# Altium PCB ARM TB V2 PCB.PcbDoc
Units mil, origin at the board's own origin, x right, y up, seen from the top; angles counter-clockwise.
Board outline 1500 x 1500 mil, 2 copper layers (Top Layer, Bottom Layer); 21 components, 20 nets, 154 pads, 11 vias.
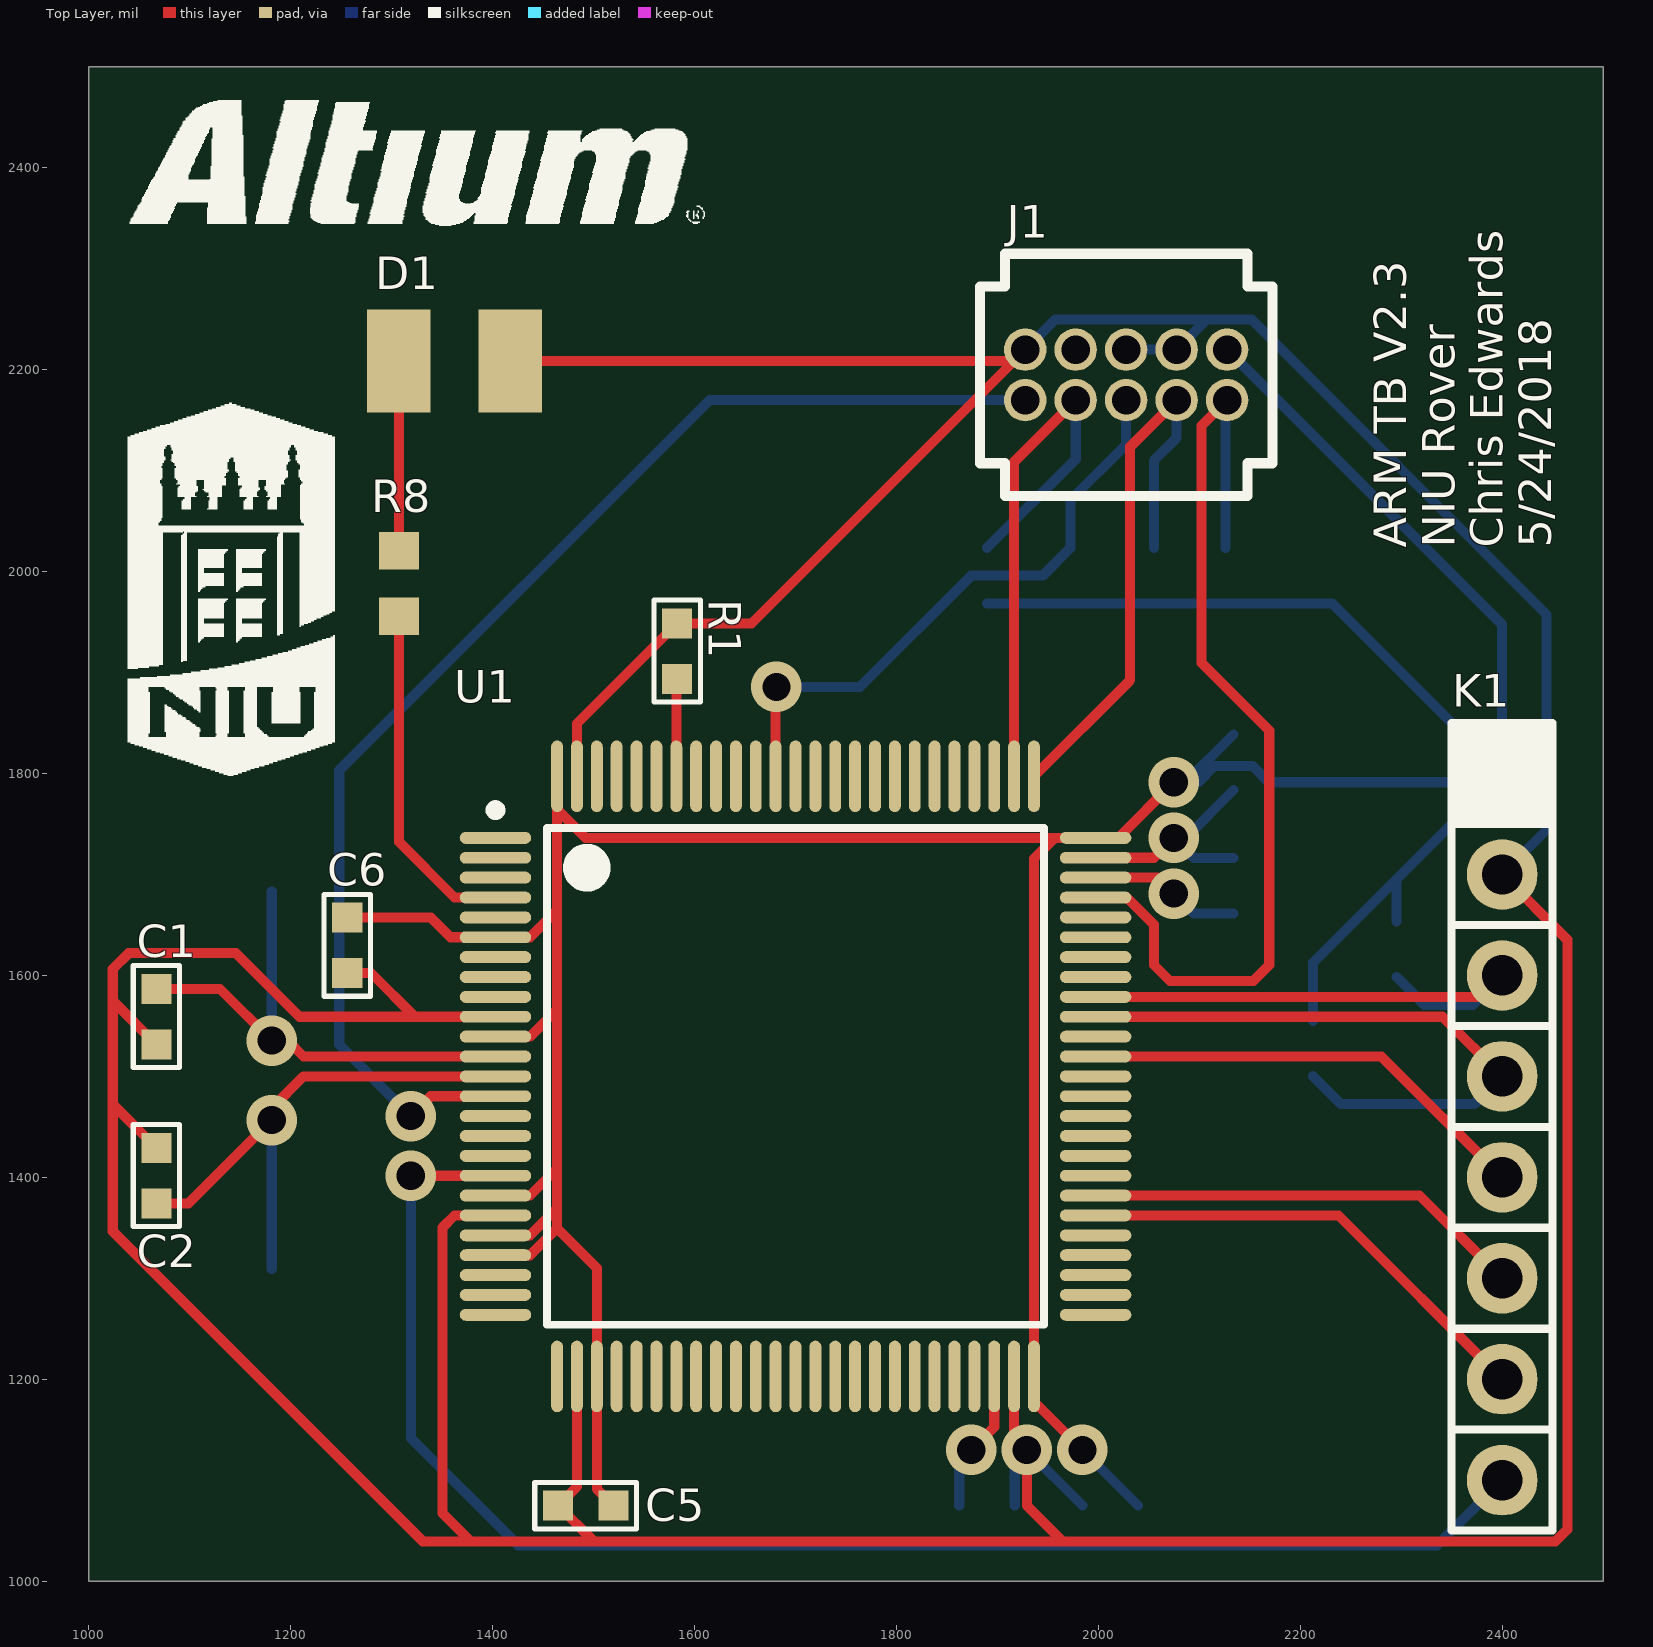
[diagram p0: Top Layer view]
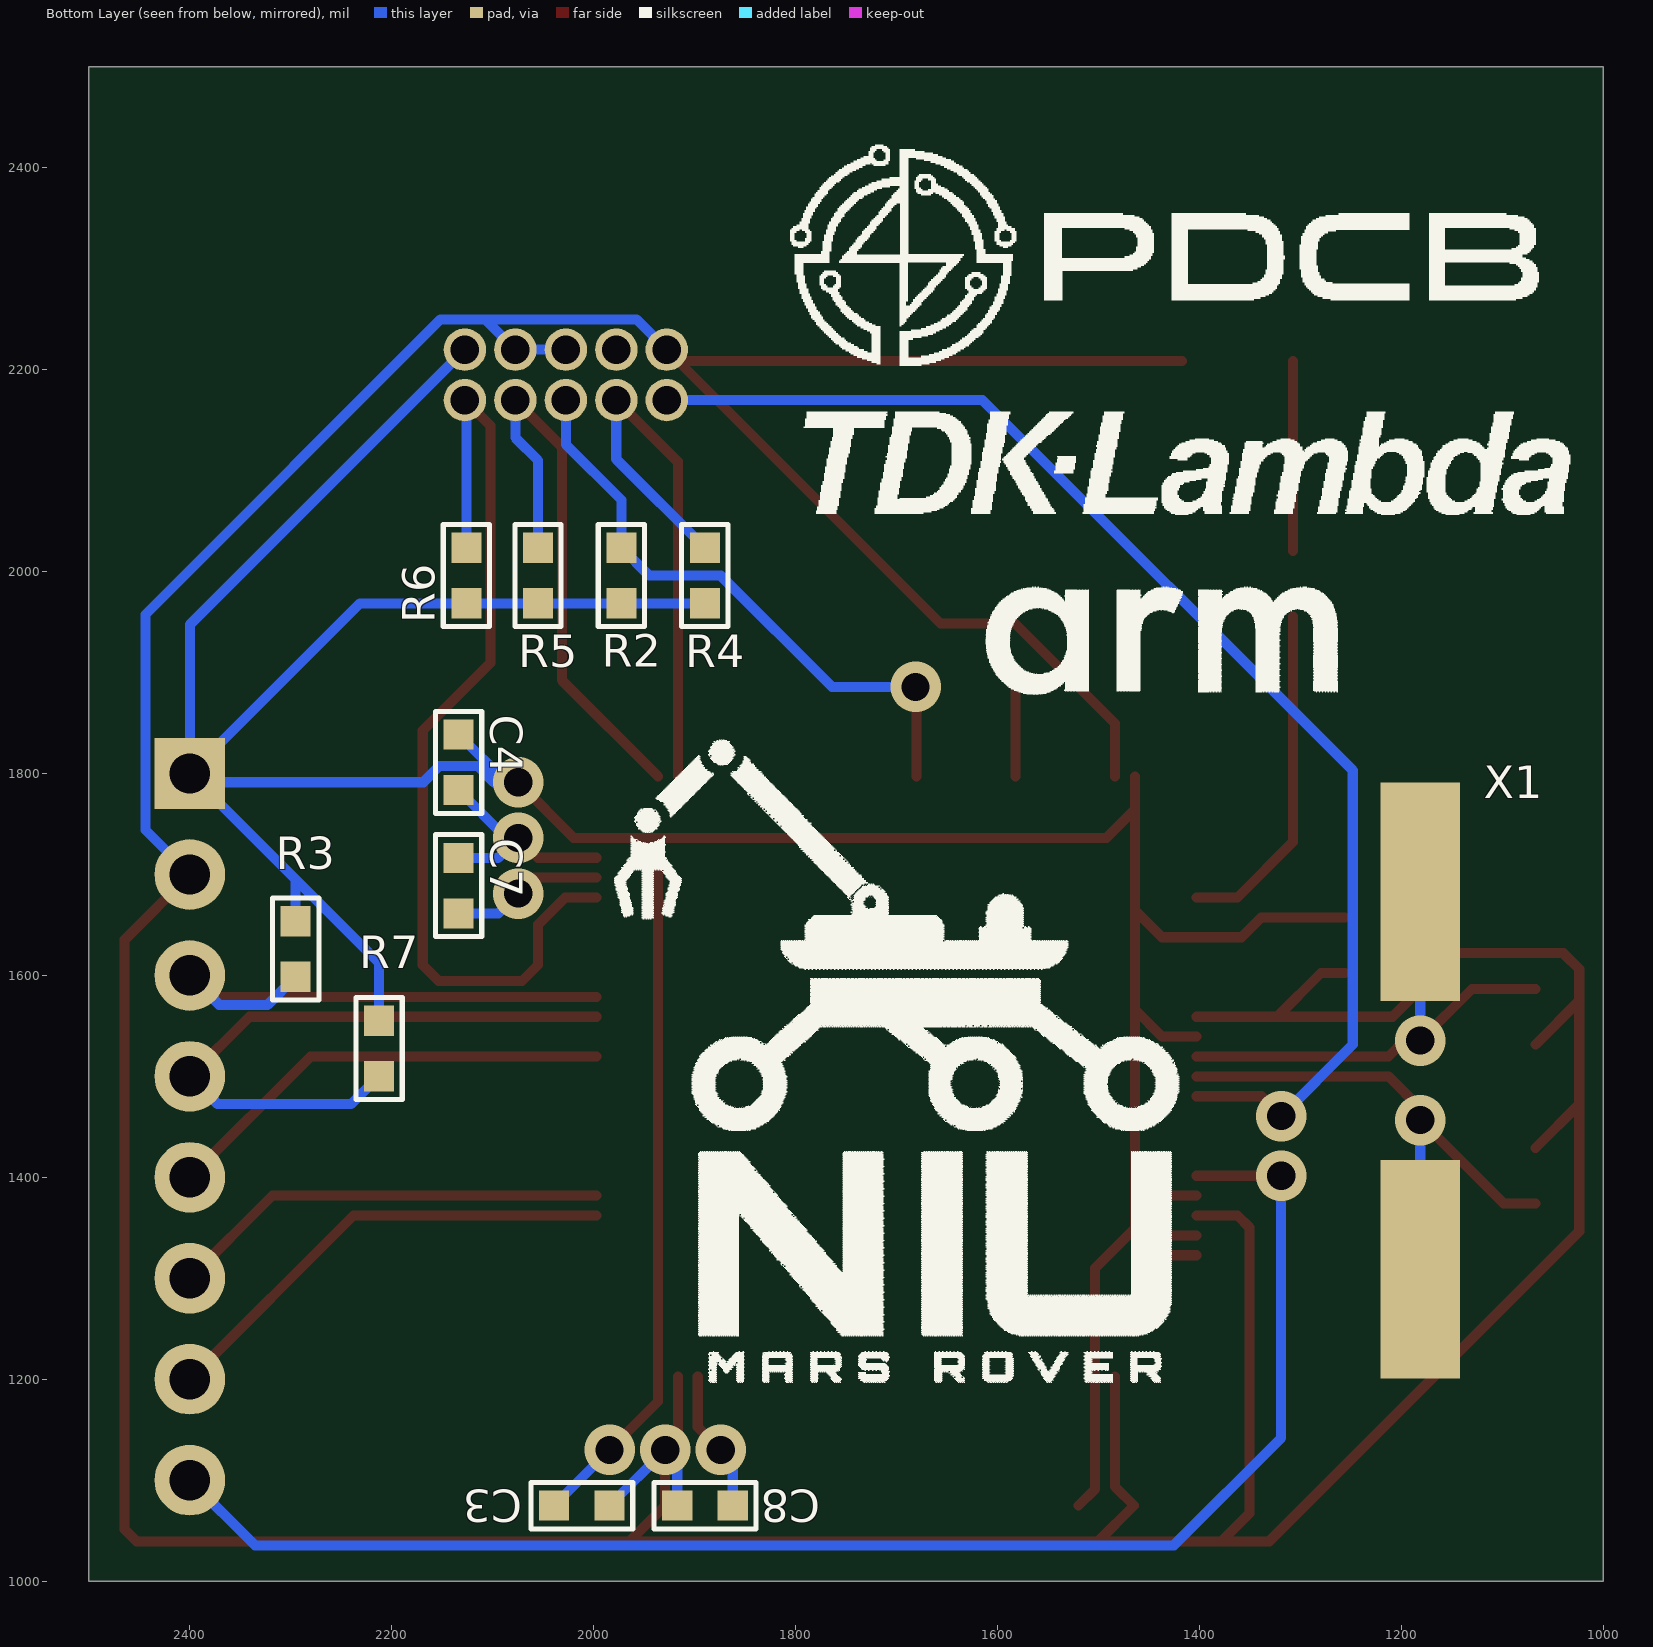
[diagram p1: Bottom Layer view, seen from below]

## Layer stack, top to bottom
Top Solder: solder mask 0.4, Solder Resist, Dk 3.5
Top Layer: signal copper 1.4
Dielectric 1: dielectric 12.6, FR-4, Dk 4.8
Bottom Layer: signal copper 1.4
Bottom Solder: solder mask 0.4, Solder Resist, Dk 3.5

## Board outline
1000,1000 2500,1000 2500,2500 1000,2500

## Design rules (kind name [scope] priority, off if disabled: settings)
AssemblyTestPointUsage [All] p1 off:
AssemblyTestpoint [All] p1 off: testpointundercomponent=TRUE minsize=40 maxsize=100 preferedsize=60 minholesize=0 maxholesize=40 preferedholesize=32 testpointgrid=1 usegrid=TRUE gridtolerance=0.01 allowsidetop=TRUE allowsidebottom=TRUE
Clearance [All] p1: gap=4 ignorepadtopadclearanceinfootprint=FALSE except(0: Arc-Hole Track-Hole SMDPad-Hole THPad-Hole Via-Hole Fill-Hole Poly-Hole Region-Hole Text-Hole)
ComponentClearance [All] p1 off: gap=1 collisioncheckmode=3 verticalgap=1 showdistances=FALSE
DiffPairsRouting DiffPairsRouting_DIFF100 [InDifferentialPairClass('DIFFPAIR_100')] p1: maxlimit=10 minlimit=4 mostfreqgap=6 toplayer_minwidth=4 toplayer_maxwidth=13 toplayer_prefwidth=5 bottomlayer_minwidth=4 bottomlayer_maxwidth=13 bottomlayer_prefwidth=5 maxuncoupledlength=315
DiffPairsRouting DiffPairsRouting_DIFF105 [InDifferentialPairClass('DIFF105')] p2: maxlimit=15 minlimit=5 mostfreqgap=15 toplayer_minwidth=5 toplayer_maxwidth=5 toplayer_prefwidth=5 bottomlayer_minwidth=5 bottomlayer_maxwidth=5 bottomlayer_prefwidth=5 maxuncoupledlength=315
FabricationTestPointUsage [All] p1 off: valid=0 allowmultiple=FALSE
FabricationTestpoint [All] p1 off: side=3 testpointundercomponent=TRUE minsize=40 maxsize=100 preferedsize=60 minholesize=0 maxholesize=40 preferedholesize=32 testpointgrid=1 allowsidetop=TRUE allowsidebottom=TRUE usegrid=TRUE gridtolerance=0.01
Height [All] p1 off: minheight=0 maxheight=1000 prefheight=500
HoleSize [All] p1: absolutevalues=TRUE maxlimit=175 minlimit=1 maxpercent=80.000 minpercent=20.000
HoleToHoleClearance [All] p1: gap=4 allowstackedmicrovias=TRUE
MatchedLengths DiffPair_DIFF100MatchedLengths [InDifferentialPairClass('DIFF100')] p1: tolerance=250 checknetsindiffpair=TRUE checkdiffpairvsdiffpair=FALSE checkxsignals=FALSE checkothers=FALSE
MinimumSolderMaskSliver [All] p1: minsoldermaskwidth=4
PlaneClearance [All] p1: clearance=8
PlaneConnect ViasConnectSolid [IsVia] p1: planeconnectstyle=Direct reliefexpansion=6 reliefentries=4 reliefconductorwidth=6 reliefairgap=6
PlaneConnect [All] p2: planeconnectstyle=Direct reliefexpansion=5 reliefentries=4 reliefconductorwidth=6 reliefairgap=5
PolygonConnect "PolygonConnect Via" [IsVia] p1: connectstyle=Direct reliefconductorwidth=10 reliefentries=4 polygonreliefangle="90 Angle" airgapwidth=10
PolygonConnect [All] p2: connectstyle=Relief reliefconductorwidth=6 reliefentries=4 polygonreliefangle="90 Angle" airgapwidth=6
RoutingVias [All] p1: holewidth=10 width=20 viastyle="Through Hole" minholewidth=8 minwidth=18 maxholewidth=28 maxwidth=50
SilkToSilkClearance [All] p1: silktosilkclearance=0
SilkToSolderMaskClearance [IsPad] p1: minsilkscreentomaskgap=1 clearancetoexposedcopper=TRUE
SolderMaskExpansion covered [isvia] p1: expansion=-11
SolderMaskExpansion [All] p2: expansion=2
Width DiffPair_DIFF100Width [InDifferentialPairClass('DIFF100')] p1: maxlimit=8 minlimit=4 preferedwidth=5 checkconnectedcopper=TRUE
Width [All] p2: maxlimit=250 minlimit=4 preferedwidth=4
16 further rules are at their usual default settings.

## Components (designator, comment, footprint, x,y, rotation, side; value= is the part's Value field where it differs from the comment)
C1 "22pF" 0603C-GENERIC 1066.93,1586.61 r270 top
C2 "22pF" 0603C-GENERIC 1066.93,1374.13 r90 top
C3 "100nF" 0603C-GENERIC 2039.25,1074.8 r180 bottom
C4 "100nF" 0603C-GENERIC 2133.86,1838.58 r270 bottom
C5 "100nF" 0603C-GENERIC 1519.68,1074.8 r180 top
C6 "100nF" 0603C-GENERIC 1255.91,1657.36 r270 top
C7 "2u2" 0603C-2U2 2133.86,1661.42 r90 bottom
C8 "2u2" 0603C-2U2 1862.2,1074.8 r0 bottom
D1 "VLMO" VLMO 1307.09,2208.66 r0 top
J1 "FTSH-105-01-XXX-D-K" FTSH-105-01-XXX-D-K 2027.56,2194.88 r180 top
K1 "HEADER-1X8" HEADER-1X8 2400,1800 r0 top
R1 "10K" 0603R-10K 1582.68,1893.7 r90 top
R2 "10K" 0603R-10K 1972.44,1968.62 r90 bottom
R3 "2K" 0603R-GENERIC 2295.28,1653.54 r270 bottom
R4 "10K" 0603R-10K 1889.76,1968.62 r90 bottom
R5 "10K" 0603R-10K 2055.12,1968.62 r90 bottom
R6 "10K" 0603R-10K 2125.98,1968.62 r90 bottom
R7 "2K" 0603R-GENERIC 2212.6,1555.12 r270 bottom
R8 "ERJ-3GEY0R00V" R0603-MED 1307.09,1988.19 r270 top value=0
U1 "STM32F401VCT6" STM-LQFP100_N 1700,1500 r0 top
X1 "8MHz" GCO800044 1220.47,1791.34 r270 bottom

## Footprints (in the part's own frame and the unit in brackets; to place one, negate y for a bottom-side part, rotate by r counter-clockwise, add the part's x,y. Pads: shape width x height; smd on the part's side, far side on the other; paste and mask are expansions set on the pad)
0603C-2U2 [mil] "CAPACITOR 0603"
  rect 30x30 smd: 1(0,0) 2(55,0)
  silkscreen extent -23,-23 78,23, body extent -4,-15 59,15, height 19
0603C-GENERIC [mil] "CAPACITOR 0603"
  rect 30x30 smd: 1(0,0) 2(55,0)
  silkscreen extent -23,-23 78,23, body extent -4,-15 59,15, height 19
0603R-10K [mil] "RESISTOR 0603"
  rect 30x30 smd: 1(0,0) 2(55,0)
  silkscreen extent -23,-23 78,23, body extent -4,-15 59,15, height 20
0603R-GENERIC [mil] "RESISTOR 0603"
  rect 30x30 smd: 1(0,0) 2(55,0)
  silkscreen extent -23,-23 78,23, body extent -4,-15 59,15, height 19
FTSH-105-01-XXX-D-K [mil]
  round 42 hole 28 mask+3: 1(-100,-25) 2(-100,25) 3(-50,-25) 4(-50,25) 5(0,-25) 6(0,25) 7(50,-25) 8(50,25) 9(100,-25) 10(100,25)
  silkscreen extent -145,-120 145,120
GCO800044 [mm]
  rect 5.5x2 smd: 1(2.75,1) 2(12.25,1)
HEADER-1X8 [mil]
  rect 70x70 hole 40: 1(0,0)
  round 70 hole 40: 2(0,-100) 3(0,-200) 4(0,-300) 5(0,-400) 6(0,-500) 7(0,-600) 8(0,-700)
  silkscreen extent -50,-750 50,50, body extent -50,-750 50,50, height 470
R0603-MED [mm] "Chip Resistor 0603 IPC Medium Density"
  rect 0.95x1 smd: 1(-0.825,0) 2(0.825,0)
  body extent -0.87,-0.48 0.87,0.47, height 0.45
STM-LQFP100_N [mm] "Thin QFP, 100-Leads, Body 14x14mm, Pitch 0.5mm, IPC Medium Density"
  oval 1.8x0.3 smd: 1(-7.55,6) 2(-7.55,5.5) 3(-7.55,5) 4(-7.55,4.5) 5(-7.55,4) 6(-7.55,3.5) 7(-7.55,3) 8(-7.55,2.5) 9(-7.55,2) 10(-7.55,1.5) 11(-7.55,1) 12(-7.55,0.5) 13(-7.55,0) 14(-7.55,-0.5) 15(-7.55,-1) 16(-7.55,-1.5) 17(-7.55,-2) 18(-7.55,-2.5) 19(-7.55,-3) 20(-7.55,-3.5) 21(-7.55,-4) 22(-7.55,-4.5) 23(-7.55,-5) 24(-7.55,-5.5) 25(-7.55,-6) 51(7.55,-6) 52(7.55,-5.5) 53(7.55,-5) 54(7.55,-4.5) 55(7.55,-4) 56(7.55,-3.5) 57(7.55,-3) 58(7.55,-2.5) 59(7.55,-2) 60(7.55,-1.5) 61(7.55,-1) 62(7.55,-0.5) 63(7.55,0) 64(7.55,0.5) 65(7.55,1) 66(7.55,1.5) 67(7.55,2) 68(7.55,2.5) 69(7.55,3) 70(7.55,3.5) 71(7.55,4) 72(7.55,4.5) 73(7.55,5) 74(7.55,5.5) 75(7.55,6)
  oval 0.3x1.8 smd: 26(-6,-7.55) 27(-5.5,-7.55) 28(-5,-7.55) 29(-4.5,-7.55) 30(-4,-7.55) 31(-3.5,-7.55) 32(-3,-7.55) 33(-2.5,-7.55) 34(-2,-7.55) 35(-1.5,-7.55) 36(-1,-7.55) 37(-0.5,-7.55) 38(0,-7.55) 39(0.5,-7.55) 40(1,-7.55) 41(1.5,-7.55) 42(2,-7.55) 43(2.5,-7.55) 44(3,-7.55) 45(3.5,-7.55) 46(4,-7.55) 47(4.5,-7.55) 48(5,-7.55) 49(5.5,-7.55) 50(6,-7.55) 76(6,7.55) 77(5.5,7.55) 78(5,7.55) 79(4.5,7.55) 80(4,7.55) 81(3.5,7.55) 82(3,7.55) 83(2.5,7.55) 84(2,7.55) 85(1.5,7.55) 86(1,7.55) 87(0.5,7.55) 88(0,7.55) 89(-0.5,7.55) 90(-1,7.55) 91(-1.5,7.55) 92(-2,7.55) 93(-2.5,7.55) 94(-3,7.55) 95(-3.5,7.55) 96(-4,7.55) 97(-4.5,7.55) 98(-5,7.55) 99(-5.5,7.55) 100(-6,7.55)
  silkscreen extent -7.67,-6.25 6.25,6.82, body extent -7,-7 7,7, height 1.6
VLMO [mm] "Vishay - VLMO31K1L2-GS08"
  rect 1.6x2.6 smd: 1(0,0) 2(2.8,0)

## Part data
C1 C2: library part 0603C-22PF-50V-C0G-PAN, "CAPACITOR 0603 CERAMIC", Manufacturer="Panasonic - ECG", Manufacturer Part Number=ECJ-1VC1H220J, Operating Temperature="-55°C ~ 125°C", Package / Case="0603 (1608 metric)", Supplier Part Number=PCC220ACVTR-ND, Temperature Coefficient="C0G, NP0", Tolerance=±5%, Voltage - Rated=50V, Capacitance=22pF, Category=Capacitors, Features="General Purpose", Lead Spacing=-, Mounting Type="Surface Mount, MLCC", Packaging="Tape & Reel (TR)", Reel=C10, RoHS="RoHS Compliant", Supplier=Digi-Key, Supplier 1=Digi-Key, Supplier Part Number 1=PCC220ACVTR-ND, Thickness=0.80mm
C3 C4 C5 C6: library part 0603C-100NF-25V-X7R-TDK, "CAPACITOR 0603 CERAMIC", Manufacturer="TDK Corporation", Manufacturer Part Number=C1608X7R1E104K, Supplier Part Number 1=445-1316-2-ND, Reel=C12, Supplier 1=Digi-Key
C7 C8: library part 0603C-2U2-6V3-X5R-MUR, "CAPACITOR 0603 CERAMIC", Reel=C20
D1: "Vishay - VLMO31K1L2-GS08", Supplier Part Number 1=VLMO31K1L2-GS08CT-ND, Supplier 1=Digi-Key
J1: "TERMINAL STRIP, .050\"(1.27mm) PITCH, 10 PINS, KEYING OPTION.", Manufacturer=SAMTEC, CREATED="September 26, 2016 - Wendy Xin", PCB DECAL=FTSH-105-01-XXX-D-K
K1: Supplier Part Number 1=S1011E-36-ND, Supplier 1=Digi-Key
R1 R2 R4 R5 R6: library part 0603R-10K, "GENERIC RESISTOR 0603", Case="0603 (1608 metric)", Manufacturer="Stackpole Electronics Inc", Manufacturer Part Number="RMCF 1/16 10K 1% R", Power (Watts)="0.1W, 1/10W", Resistance In Ohms=10.0K, Supplier Part Number=RMCF1/1610KFRDKR-ND, Supplier Part Number 1=RMCF0603FT10K0DKR-ND, Temperature Coefficient=±100ppm/°C, Tolerance=±1%, Category=Resistors, Composition="Thick Film", Lead Style="Surface Mount (SMD - SMT)", Packaging=Digi-Reel®, Reel=R21, RoHS="RoHS Compliant", Supplier=Digi-Key, Supplier 1=Digi-Key
R3 R7: library part 0603R-2K, "GENERIC RESISTOR 0603", Case="0603 (1608 metric)", Manufacturer="Stackpole Electronics Inc", Manufacturer Part Number="RMCF 1/16 2K 1% R", Power (Watts)="0.1W, 1/10W", Resistance In Ohms=2.00K, Supplier Part Number=RMCF1/162KFRTR-ND, Temperature Coefficient=±100ppm/°C, Tolerance=±1%, Category=Resistors, Composition="Thick Film", Lead Style="Surface Mount (SMD - SMT)", Packaging="Tape & Reel (TR)", Reel=R9, RoHS="RoHS Compliant", Supplier=Digi-Key, Supplier 1=Digi-Key, Supplier Part Number 1=RMCF1/162KFRTR-ND
R8: library part CMP-001-0038-1-1, "RES SMD 0 OHM JUMPER 1/10W 0603", Case/Package=0603, Power=100mW, AncestorItemRevisionGUID=https://www.digikey.com/product-detail/en/panasonic-electronic-components/ERJ-3GEY0R00V/P0.0GTR-ND/135656, ComponentType=Resistor, ContentType=Component, Folder=Components\Resistors\0603\, Mount=SMD, Pins=2, ReleaseDate="10/07/2017 10:09:55 PM", RevisionId=1
U1: "ARM Cortex-M4 32-bit MCU+FPU, 105 DMIPS, 256 kB Flash, 64 kB Internal RAM, 79 I/Os, 100-pin LQFP, -40 to 85 degC, Tray", I/Os (High Current)=79, Manufacturer=STMicroelectronics, Operating Frequency(F) (Processor speed) (MHz)=84, Supplier Part Number 1=497-14048-ND, Supply Voltage(Vcc) max (V)=3.6, Supply Voltage(Vcc) min (V)=1.8, ComponentLink1Description="Manufacturer URL", ComponentLink1URL=http://www.st.com/web/en/home.html, ComponentLink2Description=Datasheet, ComponentLink2URL=http://www.st.com/st-web-ui/static/active/en/resource/technical/document/data_brief/DM00071938.pdf, ComponentLink3Description="Package Specification", ComponentLink3URL=http://www.st.com/st-web-ui/static/active/en/resource/technical/document/data_brief/DM00071938.pdf, Core="ARM Cortex-M4", DatasheetVersion="Rev. 1", FLASH Size (Prog) (kB)=256, Internal RAM Size (kB)=64, Mounting Technology="Surface Mount", PackageDescription="100-Pin Low Profile Quad Flat Package, 14 x 14 mm Body, 0.5 mm Pitch", PackageReference=LQFP100, PackageVersion="Rev. 1, 06/2013", Packing=Tray, Partnumber=STM32F401VCT6, Supplier 1=Digi-Key, Supplier 2=Newark, Supplier 3=Mouser, Supplier Part Number 2=19X6223, Supplier Part Number 3=511-STM32F401VCT6
X1: library part GC0800044, "Diodes Incorporated GC0800044", Supplier Part Number 1=GC0800044TR-ND, Supplier 1=Digi-Key

## Via types
v1: diameter 50, hole 28, Top Layer to Bottom Layer, 11 vias

## Nets (pads, with @x,y where several pads share a name; then routed paths per layer and width w, separated by ;. In a path a pad name is that pad's centre, name@x,y a point inside that pad or via, vN(x,y) a via of type N, cw(c..) or ccw(c..) an arc to the next point about the centre after c; other vN are vias at no path point)
3.3V: C3.1 C4.1 C5.1 C6.1 J1.1 K1.1 R2.1 R3.1 R4.1 R5.1 R6.1 R7.1 U1.6 U1.11 U1.19 U1.21 U1.22 U1.28 U1.50 U1.75 U1.100 | length 4493.1
  Top Layer w10: C6.1 1338.7,1657.36 1358.27,1637.8 U1.6 1437.01,1637.8 1463.78,1664.57 ; U1.22 1437.01,1322.83 1463.78,1349.61 ; U1.21 1437.01,1342.52 1463.78,1369.29 ; U1.19 1437.01,1381.89 1463.78,1408.66 ; U1.11 1437.01,1539.37 1463.78,1566.14 ; U1.100 U1.100@1463.78,1764.57 ; C5.1 1503.15,1091.34 U1.28 1503.15,1310.24 1463.78,1349.61 ; v1(1984.25,1129.92) 1936.22,1177.95 U1.50 1936.22,1715.75 1956.69,1736.22 ; v1(2074.8,1791.34) 2019.68,1736.22 U1.75 1956.69,1736.22 ; 1463.78,1349.61 1463.78,1369.29 ; 1463.78,1369.29 1463.78,1408.66 ; 1463.78,1408.66 1463.78,1566.14 ; 1463.78,1566.14 1463.78,1664.57 ; 1463.78,1664.57 U1.100@1463.78,1764.57 ; U1.100@1463.78,1764.57 1492.13,1736.22 1956.69,1736.22
  Bottom Layer w10: R4.1 R2.1 R5.1 R6.1 2231.38,1968.62 K1.1 ; v1(1984.25,1129.92) 1984.25,1129.8 C3.1 ; v1(2074.8,1791.34) v1@2086.61,1791.34 ; J1.1 2400,1947.44 K1.1 ; C4.1 v1@2086.61,1791.34 ; R7.1 2212.6,1612.6 2295.28,1695.28 ; R3.1 2295.28,1695.28 ; v1@2086.61,1791.34 2098.89,1791.34 2115.13,1807.58 2152.59,1807.58 2168.83,1791.34 K1.1@2391.34,1791.34 ; 2295.28,1695.28 K1.1@2391.34,1791.34 ; K1.1@2391.34,1791.34 K1.1
"Analog In": K1.8 U1.18 | length 1495.6
  Top Layer w10: v1(1318.9,1401.57) U1.18
  Bottom Layer w10: v1(1318.9,1401.57) 1318.9,1141.73 1425.2,1035.43 2335.43,1035.43 K1.8
"Dig. Input": K1.7 U1.56 | length 469.9
  Top Layer w10: U1.56 2237.8,1362.2 K1.7
"Dig. Output": K1.6 U1.57 | length 436.7
  Top Layer w10: U1.57 2318.11,1381.89 K1.6
GND: C1.2 C2.2 C3.2 C4.2 C5.2 C6.2 C7.2 C8.2 D1.2 J1.3 J1.5 J1.9 K1.2 R1.2 U1.10 U1.20 U1.27 U1.49 U1.74 U1.99 | length 6412.9
  Top Layer w10: C2.2 1023.62,1472.44 ; C1.2 1066.81,1531.61 1023.62,1574.8 ; C6.2 1279.53,1602.36 1322.83,1559.06 ; U1.20 1362.2,1362.2 1350.39,1350.39 1350.39,1066.93 1377.95,1039.37 ; U1.10 1322.83,1559.06 ; D1.2 J1.9@1916.34,2208.66 ; U1.27 1483.46,1093.58 C5.2 1500.12,1039.37 ; U1.99 1483.46,1849.49 R1.2 1656.38,1948.7 J1.9@1916.34,2208.66 ; U1.49 1916.54,1142.52 v1(1929.13,1129.92) 1929.13,1074.8 1964.57,1039.37 ; J1.9 J1.9@1916.34,2208.66 ; U1.74 2055.12,1716.54 v1(2074.8,1736.22) ; K1.2 2464.57,1635.43 2464.57,1051.18 2452.76,1039.37 1964.57,1039.37 ; 1023.62,1472.44 1023.62,1346.46 1330.71,1039.37 1377.95,1039.37 ; 1023.62,1472.44 1023.62,1574.8 ; 1023.62,1574.8 1023.62,1606.3 1039.37,1622.05 1145.67,1622.05 1208.66,1559.06 1322.83,1559.06 ; 1377.95,1039.37 1500.12,1039.37 ; 1500.12,1039.37 1964.57,1039.37
  Bottom Layer w10: C8.2 1917.2,1117.99 v1(1929.13,1129.92) C3.2 ; J1.9 1957.56,2249.88 2107.56,2249.88 ; J1.5 J1.3 2107.56,2249.88 ; C7.2 2094.61,1716.42 v1(2074.8,1736.22) 2086.5,1736.22 C4.2 ; K1.2 2444,1744 2444,1957.58 2151.69,2249.88 2107.56,2249.88
JTCK/SWCLK: J1.4 R5.2 U1.76 | length 586.7
  Top Layer w10: U1.76 2031.5,1892.52 2031.5,2123.82 J1.4
  Bottom Layer w10: R5.2 2055.12,2110.24 2077.56,2132.68 J1.4
JTDI: J1.8 R4.2 U1.77 | length 580.5
  Top Layer w10: U1.77 1916.54,2108.86 J1.8
  Bottom Layer w10: R4.2 1977.56,2111.42 J1.8
JTDO/SWO: J1.6 R2.2 U1.89 | length 606.4
  Top Layer w10: U1.89 1680.32,1885.04 v1(1681.1,1885.83)
  Bottom Layer w10: v1(1681.1,1885.83) 1763.78,1885.83 1874.02,1996.06 1944.88,1996.06 R2.2 1972.44,2070.87 2027.56,2125.98 J1.6
JTMS/SWDIO: J1.2 R6.2 U1.72 | length 981
  Top Layer w10: U1.72 2028.17,1677.17 2055.12,1650.21 2055.12,1610.24 2070.87,1594.49 2153.54,1594.49 2169.29,1610.24 2169.29,1842.52 2102.36,1909.45 2102.36,2144.68 J1.2
  Bottom Layer w10: R6.2 2125.98,2168.31 J1.2
LED: R8.2 U1.4 | length 341.9
  Top Layer w10: R8.2 1307.09,1732.28 1362.2,1677.17 U1.4
NetC1_1: C1.1 U1.12 X1.1 | length 511.2
  Top Layer w10: C1.1 1129.92,1586.61 v1(1181.1,1535.43) 1196.85,1535.43 1212.6,1519.68 U1.12
  Bottom Layer w10: v1(1181.1,1535.43) X1.1
NetC2_1: C2.1 U1.13 X1.2 | length 542.5
  Top Layer w10: C2.1 1098.54,1374.13 v1(1181.1,1456.69) 1181.1,1468.5 1212.6,1500 U1.13
  Bottom Layer w10: X1.2 v1(1181.1,1456.69)
NetC7_1: C7.1 U1.73 | length 151.3
  Top Layer w10: U1.73 2059.06,1696.85 v1(2074.8,1681.1)
  Bottom Layer w10: v1(2074.8,1681.1) 2094.49,1661.42 C7.1
NetC8_1: C8.1 U1.48 | length 142.3
  Top Layer w10: v1(1874.02,1129.92) 1896.85,1152.76 U1.48
  Bottom Layer w10: C8.1 1862.2,1118.11 v1(1874.02,1129.92)
NetD1_1: D1.1 R8.1 | length 188
  Top Layer w10: R8.1 D1.1
NetR1_1: R1.1 U1.94 | length 96.8
  Top Layer w10: U1.94 1581.89,1892.91 R1.1
nRST: J1.10 U1.14 | length 1295.3
  Top Layer w10: v1(1318.9,1460.63) 1338.58,1480.32 U1.14
  Bottom Layer w10: v1(1318.9,1460.63) 1248.03,1531.5 1248.03,1803.15 1614.76,2169.88 J1.10
PWM: K1.5 U1.64 | length 452.3
  Top Layer w10: U1.64 2280.31,1519.68 K1.5
SCL: K1.3 R3.2 U1.67 | length 539.8
  Top Layer w10: U1.67 2378.74,1578.74 K1.3
  Bottom Layer w10: R3.2 2322.95,1570.87 2370.87,1570.87 K1.3
SDA: K1.4 R7.2 U1.66 | length 637.5
  Top Layer w10: U1.66 2340.94,1559.06 K1.4
  Bottom Layer w10: R7.2 2240.28,1472.44 2372.44,1472.44 K1.4
pads on no net: J1.7 U1.1 U1.2 U1.3 U1.5 U1.7 U1.8 U1.9 U1.15 U1.16 U1.17 U1.23 U1.24 U1.25 U1.26 U1.29 U1.30 U1.31 U1.32 U1.33 U1.34 U1.35 U1.36 U1.37 U1.38 U1.39 U1.40 U1.41 U1.42 U1.43 U1.44 U1.45 U1.46 U1.47 U1.51 U1.52 U1.53 U1.54 U1.55 U1.58 U1.59 U1.60 U1.61 U1.62 U1.63 U1.65 U1.68 U1.69 U1.70 U1.71 U1.78 U1.79 U1.80 U1.81 U1.82 U1.83 U1.84 U1.85 U1.86 U1.87 U1.88 U1.90 U1.91 U1.92 U1.93 U1.95 U1.96 U1.97 U1.98

## Polygon pours and split planes (outlines as drawn)
3.3V on Bottom Layer (solid, pour order 0): 2192.91,1771.65

## Silkscreen, mask and mechanical layers (free items; w line width, h text height)
Top Overlay:
  drawing of 21 lines, arcs and shapes, not listed
  text "ARM TB V2.3 / NIU Rover / Chris Edwards / 5/24/2018" at 2448.82,2023.62 h32 r90
Bottom Overlay:
  drawing of 40 lines, arcs and shapes, not listed
Mechanical 15:
  the board outline again, w10